# Altium PCB PCB1.PcbDoc
Units mil, origin at the board's own origin, x right, y up, seen from the top; angles counter-clockwise.
Board outline 540 x 1245 mil, 2 copper layers (Top Layer, Bottom Layer); 26 components, 22 nets, 111 pads, 0 vias.
Unrouted connection lines stored in the file: 60.
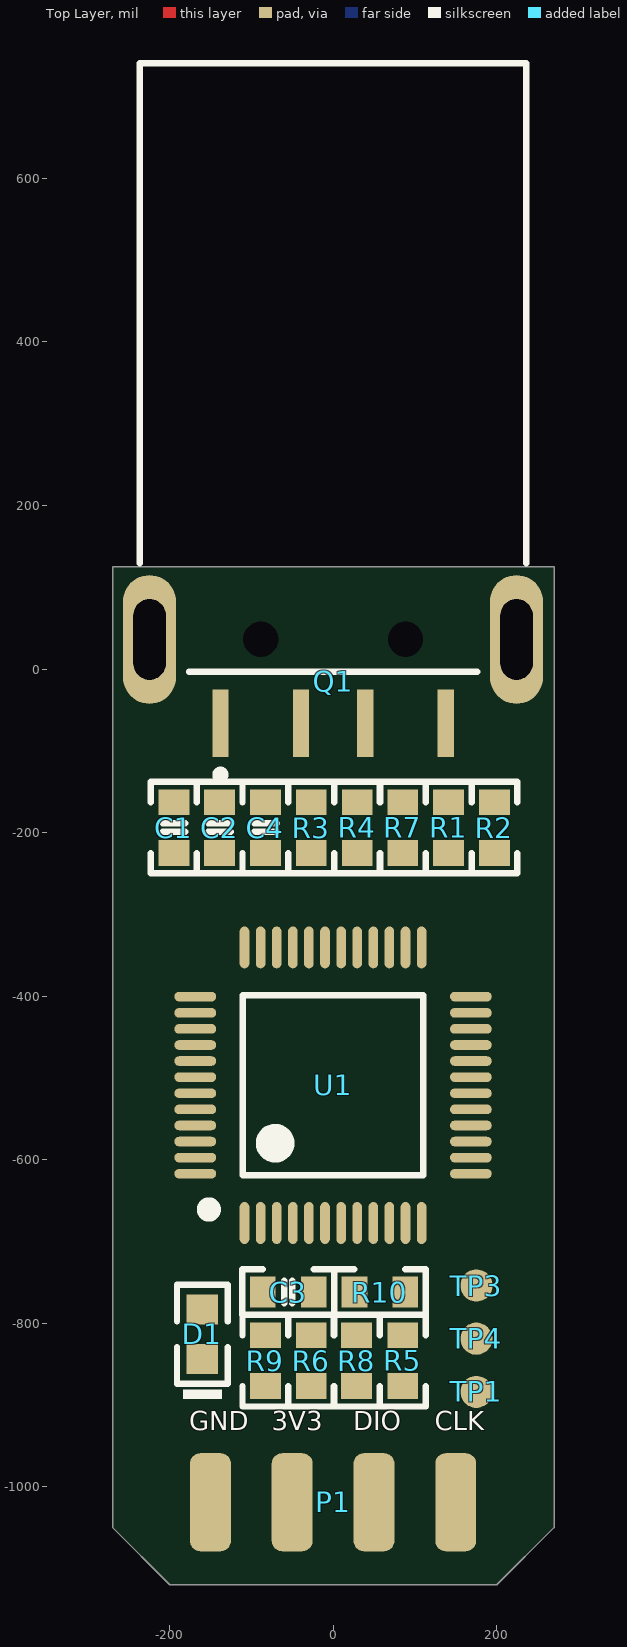
[diagram p0: Top Layer view]
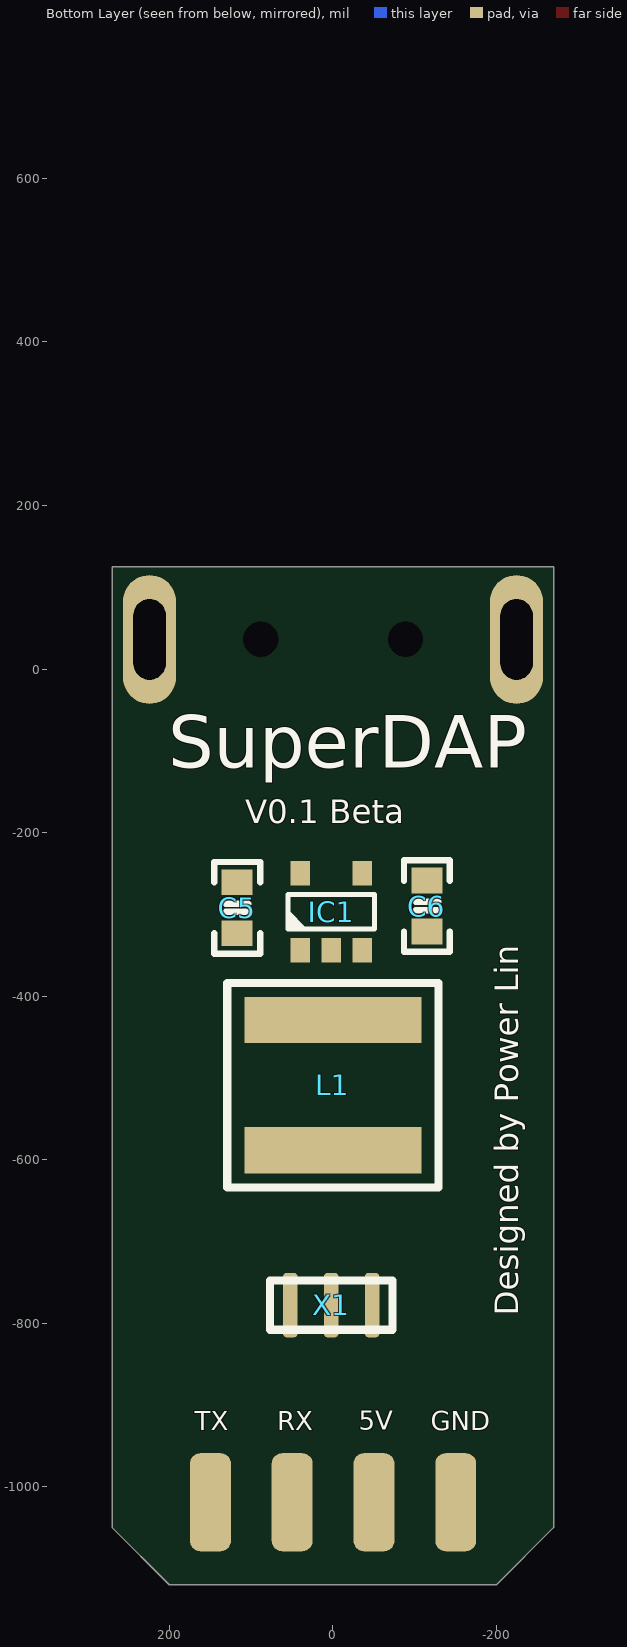
[diagram p1: Bottom Layer view, seen from below]

## Layer stack, top to bottom
Top Solder: solder mask 0.4, Solder Resist, Dk 3.5
Top Layer: signal copper 1.4
Dielectric 1: dielectric 12.6, FR-4, Dk 4.8
Bottom Layer: signal copper 1.4
Bottom Solder: solder mask 0.4, Solder Resist, Dk 3.5

## Board outline
-200,-1120 -270,-1050 -270,125 270,125 270,-1050 200,-1120

## Design rules (kind name [scope] priority, off if disabled: settings)
Clearance [All] p1: gap=10 ignorepadtopadclearanceinfootprint=TRUE
DiffPairsRouting [All] p1: maxlimit=10 minlimit=10 mostfreqgap=10 toplayer_minwidth=15 toplayer_maxwidth=15 toplayer_prefwidth=15 bottomlayer_minwidth=15 bottomlayer_maxwidth=15 bottomlayer_prefwidth=15 maxuncoupledlength=500
PlaneConnect [All] p1: planeconnectstyle=Direct reliefexpansion=20 reliefentries=4 reliefconductorwidth=10 reliefairgap=10
PolygonConnect [All] p1: connectstyle=Direct reliefconductorwidth=10 reliefentries=4 polygonreliefangle="90 Angle" airgapwidth=10
RoutingVias [All] p1: holewidth=17.72 width=29.53 viastyle="Through Hole" minholewidth=11.81 minwidth=23.62 maxholewidth=17.72 maxwidth=29.53
SolderMaskExpansion [All] p1: expansion=4 istentingtop=FALSE
Width [All] p1: maxlimit=50 minlimit=12 preferedwidth=12
28 further rules are at their usual default settings.

## Classes and differential pairs
component class U_XM5062_33: C5 C6 IC1 L1
component class U_DAP_C8T6: C1 C2 C3 C4 D1 R1 R2 R3 R4 R5 R6 R7 R8 R9 R10 U1 X1
component class DashDAP: P1 Q1 TP1 TP3 TP4
differential pair DAP_USB: +DAP_USB_P -DAP_USB_N

## Components (designator, comment, footprint, x,y, rotation, side; value= is the part's Value field where it differs from the comment)
C1 "100nF" CAP-0603 -195,-194 r90 top
C2 "100nF" CAP-0603 -139,-194 r90 top
C3 "100nF" CAP-0603 -55.1,-762 r0 top
C4 "100nF" CAP-0603 -83,-194 r90 top
C5 "4.7uF" CAP-0603 117,-292 r270 bottom
C6 "10uF" CAP-0603 -115,-289.9 r270 bottom
D1 "RED" LED_0603 -160,-813.69 r90 top
IC1 "XM5062_33" SOT-23-5 2,-297 r270 bottom
L1 "2.2uH" XAL6060-103MEB 0,-509 r270 bottom
P1 "HDR2x4_2.54" HDR2X4_2.54_180H 149.73,-1019 r270 top
Q1 "USB A" USB-A-male -6,306 r90 top
R1 "10K" R-0603 141.15,-194 r90 top
R2 "1K" R-0603 197,-194 r270 top
R3 "39R" R-0603 -27,-194 r270 top
R4 "39R" R-0603 29.26,-194 r270 top
R5 "39R" R-0603 85,-845.9 r270 top
R6 "39R" R-0603 -27,-845.9 r270 top
R7 "1K" R-0603 85,-194 r90 top
R8 "500R" R-0603 28.63,-845.9 r90 top
R9 "500R" R-0603 -83,-845.9 r90 top
R10 "10K" R-0603 57,-762 r0 top
TP1 "TestPoint" TestPoint 175,-884 r90 top
TP3 "TestPoint" TestPoint 175,-754 r90 top
TP4 "TestPoint" TestPoint 175,-819 r90 top
U1 "STM32F103C8T6" LQFP_48 -0.26,-509 r0 top
X1 "8MHz" CSTCE_G(A)村田晶振 2,-778 r180 bottom

## Footprints (in the part's own frame and the unit in brackets; to place one, negate y for a bottom-side part, rotate by r counter-clockwise, add the part's x,y. Pads: shape width x height; smd on the part's side, far side on the other; paste and mask are expansions set on the pad)
CAP-0603 [mm]
  rect 0.8x0.96 smd: 1(-0.79,0) 2(0.79,0)
  silkscreen extent -1.42,-0.71 1.42,0.71, body extent -0.76,-0.39 0.76,0.39, height 0.9
CSTCE_G(A)村田晶振 [mm]
  rrect50% 0.45x2 smd: 1(1.27,0) 2(0,0) 3(-1.27,0)
  silkscreen extent -1.91,-0.76 1.91,0.76, body extent -1.9,-0.8 1.9,0.8, height 1
HDR2X4_2.54_180H [mil]
  rrect50% 120x50 smd: 1(0,0) 3(0,-100) 5(0,-200) 7(0,-300)
  rrect50% 120x50 smd far side: 2(0,0) 4(0,-100) 6(0,-200) 8(0,-300)
  body extent -38,-350 415,50, height 78
LED_0603 [mm]
  rect 0.93x0.98 smd: A(0.77,0) K(-0.77,0)
  silkscreen extent -2.01,-0.79 1.54,0.79, body extent -0.8,-0.4 0.8,0.4, height 0.6
LQFP_48 [mm]
  oval 0.3x1.3 smd: 1(-2.75,-4.28) 2(-2.25,-4.28) 3(-1.75,-4.28) 4(-1.25,-4.28) 5(-0.75,-4.28) 6(-0.25,-4.28) 7(0.25,-4.28) 8(0.75,-4.28) 9(1.25,-4.28) 10(1.75,-4.28) 11(2.25,-4.28) 12(2.75,-4.28) 25(2.75,4.28) 26(2.25,4.28) 27(1.75,4.28) 28(1.25,4.28) 29(0.75,4.28) 30(0.25,4.28) 31(-0.25,4.28) 32(-0.75,4.28) 33(-1.25,4.28) 34(-1.75,4.28) 35(-2.25,4.28) 36(-2.75,4.28)
  oval 1.3x0.3 smd: 13(4.28,-2.75) 14(4.28,-2.25) 15(4.28,-1.75) 16(4.28,-1.25) 17(4.28,-0.75) 18(4.28,-0.25) 19(4.28,0.25) 20(4.28,0.75) 21(4.28,1.25) 22(4.28,1.75) 23(4.28,2.25) 24(4.28,2.75) 37(-4.28,2.75) 38(-4.28,2.25) 39(-4.28,1.75) 40(-4.28,1.25) 41(-4.28,0.75) 42(-4.28,0.25) 43(-4.28,-0.25) 44(-4.28,-0.75) 45(-4.28,-1.25) 46(-4.28,-1.75) 47(-4.28,-2.25) 48(-4.28,-2.75)
  silkscreen extent -3.98,-3.99 2.8,2.8, body extent -4.5,-4.5 4.5,4.5, height 1.52
R-0603 [mm]
  rect 0.8x0.96 smd: 1(-0.79,0) 2(0.79,0)
  silkscreen extent -1.42,-0.71 1.42,0.71, body extent -0.76,-0.38 0.76,0.38, height 0.41
SOT-23-5 [mil]
  rect 30x24 smd: 1(47,-38) 2(47,0) 3(47,38) 4(-47,38) 5(-47,-38)
  silkscreen extent -21,-53 21,53, body extent -55,-57 55,57, height 57
TestPoint [mm]
  round 1 smd: 1(0,0)
USB-A-male [mm]
  rect 2.1x0.5 smd: 1(-9.453,3.354) 2(-9.453,0.854) 3(-9.453,-1.146) 4(-9.453,-3.646)
  oval 4x1.65 hole 1 slot 2.5 at 0 deg: 5(-6.853,-5.846) 6(-6.853,5.554)
  round 0.8 hole 1.1 unplated: MH1(-6.853,-2.396) MH2(-6.853,2.104)
  silkscreen extent -11.18,-6.15 11.05,5.85, body extent -7.77,-6.16 10.56,5.85, height 1.75
XAL6060-103MEB [mm]
  rect 1.43x5.5 smd: 1(-2.02,0) 2(2.02,0)
  silkscreen extent -3.18,-3.28 3.18,3.28

## Part data
C1 C2 C3 C4 C5 C6: library part CAP, "贴片电容", Package=0402, SuppliersPartNumber=C52923, ComponentLink1Description=供应商链接, ComponentLink1URL=http://www.szlcsc.com/product/details_53938.html, Supplier=LC
D1: library part LED, "发光二极管", Package=0603, SuppliersPartNumber=C2290, ComponentLink1Description=供应商链接, ComponentLink1URL=http://www.szlcsc.com/product/details_2663.html, Supplier=LC
IC1: library part XM5062, "降压转换芯片", Manufacturer_Name="TE Connectivity", Manufacturer_Part_Number=1-1393258-5, Datasheet Link=http://www.te.com/commerce/DocumentDelivery/DDEController?Action=showdoc&DocId=Data+Sheet%7FSR2M%7F1116%7Fpdf%7FEnglish%7FENG_DS_SR2M_1116.pdf%7F1-1393258-5, Height=25mm
L1: library part INDUCTOR, "贴片电感", Package=0402, SuppliersPartNumber=C32041, ComponentLink1Description=供应商链接, ComponentLink1URL=http://www.szlcsc.com/product/details_33003.html, Supplier=LC
P1: "Header"
Q1: "USB 接口"
R1 R2 R3 R4 R5 R6 R7 R8 R9 R10: library part RES, "贴片电阻", Package=0805, SuppliersPartNumber=C17798, Supplier=LC
TP1 TP3 TP4: "测试点"
U1: library part STM32F103Cx, "微控制器"
X1: library part XTAL, "有源晶振"

## Nets (pads, with @x,y where several pads share a name; then routed paths per layer and width w, separated by ;. In a path a pad name is that pad's centre, name@x,y a point inside that pad or via, vN(x,y) a via of type N, cw(c..) or ccw(c..) an arc to the next point about the centre after c; other vN are vias at no path point)
3.3V: C1.1 C2.1 C4.1 C6.2 IC1.5 L1.2 P1.5 R1.2 R7.1 R8.1 R9.1 R10.2 U1.1 U1.9 U1.24 U1.36 U1.48
5V: C5.2 IC1.1 IC1.4 P1.6 Q1.1
DAP_USB_N: R3.2 U1.32
DAP_USB_N: Q1.2 R3.1
DAP_USB_P: R4.2 U1.33
DAP_USB_P: Q1.3 R4.1 R7.2
GND: C1.2 C2.2 C3.1 C4.2 C5.1 C6.1 D1.K IC1.2 P1.7 P1.8 Q1.4 TP1.1 U1.8 U1.23 U1.35 U1.44 U1.47 X1.2
NetC3_2: C3.2 R10.1 U1.7
NetD1_A: D1.A R2.1
NetIC1_3: IC1.3 L1.1
NetP1_1: P1.1 R5.2
NetP1_2: P1.2 U1.12
NetP1_3: P1.3 R6.2
NetP1_4: P1.4 U1.13
NetR1_1: R1.1 U1.18
NetR2_2: R2.2 U1.30
NetR5_1: R5.1 R8.2 U1.26
NetR6_1: R6.1 R9.2 U1.27
NetTP3_1: TP3.1 U1.37
NetTP4_1: TP4.1 U1.34
NetU1_5: U1.5 X1.1
NetU1_6: U1.6 X1.3
pads on no net: Q1.5 Q1.6 Q1.MH1 Q1.MH2 U1.2 U1.3 U1.4 U1.10 U1.11 U1.14 U1.15 U1.16 U1.17 U1.19 U1.20 U1.21 U1.22 U1.25 U1.28 U1.29 U1.31 U1.38 U1.39 U1.40 U1.41 U1.42 U1.43 U1.45 U1.46

## Silkscreen, mask and mechanical layers (free items; w line width, h text height)
Top Overlay:
  text "GND" at -176.01,-938.7 h40
  text "3V3" at -75.09,-938.7 h40
  text "DIO" at 24.2,-938.7 h40
  text "CLK" at 124.27,-938.74 h40
Bottom Overlay:
  text "SuperDAP" at 201.49,-142.19 h110
  text "V0.1 Beta" at 106.9,-198.62 h50
  text "Designed by Power Lin" at -236.25,-790.69 h50 r270
  text "5V" at -31.74,-938.4 h40
  text "GND" at -119.99,-938.7 h40
  text "RX" at 68.16,-939 h40
  text "TX" at 168.87,-939 h40
Mechanical 1:
  the board outline again, w10